# Altium PCB MODULE_DRIVER.PcbDoc (part 2 of 2)
Units mil, origin at the board's own origin, x right, y up, seen from the top; angles counter-clockwise.
Board outline 3897.64 x 6754.13 mil, 4 copper layers (TOP, GND, POWER, BOTTOM), stack 23.756 mil thick; 214 components, 85 nets, 571 pads, 350 vias.
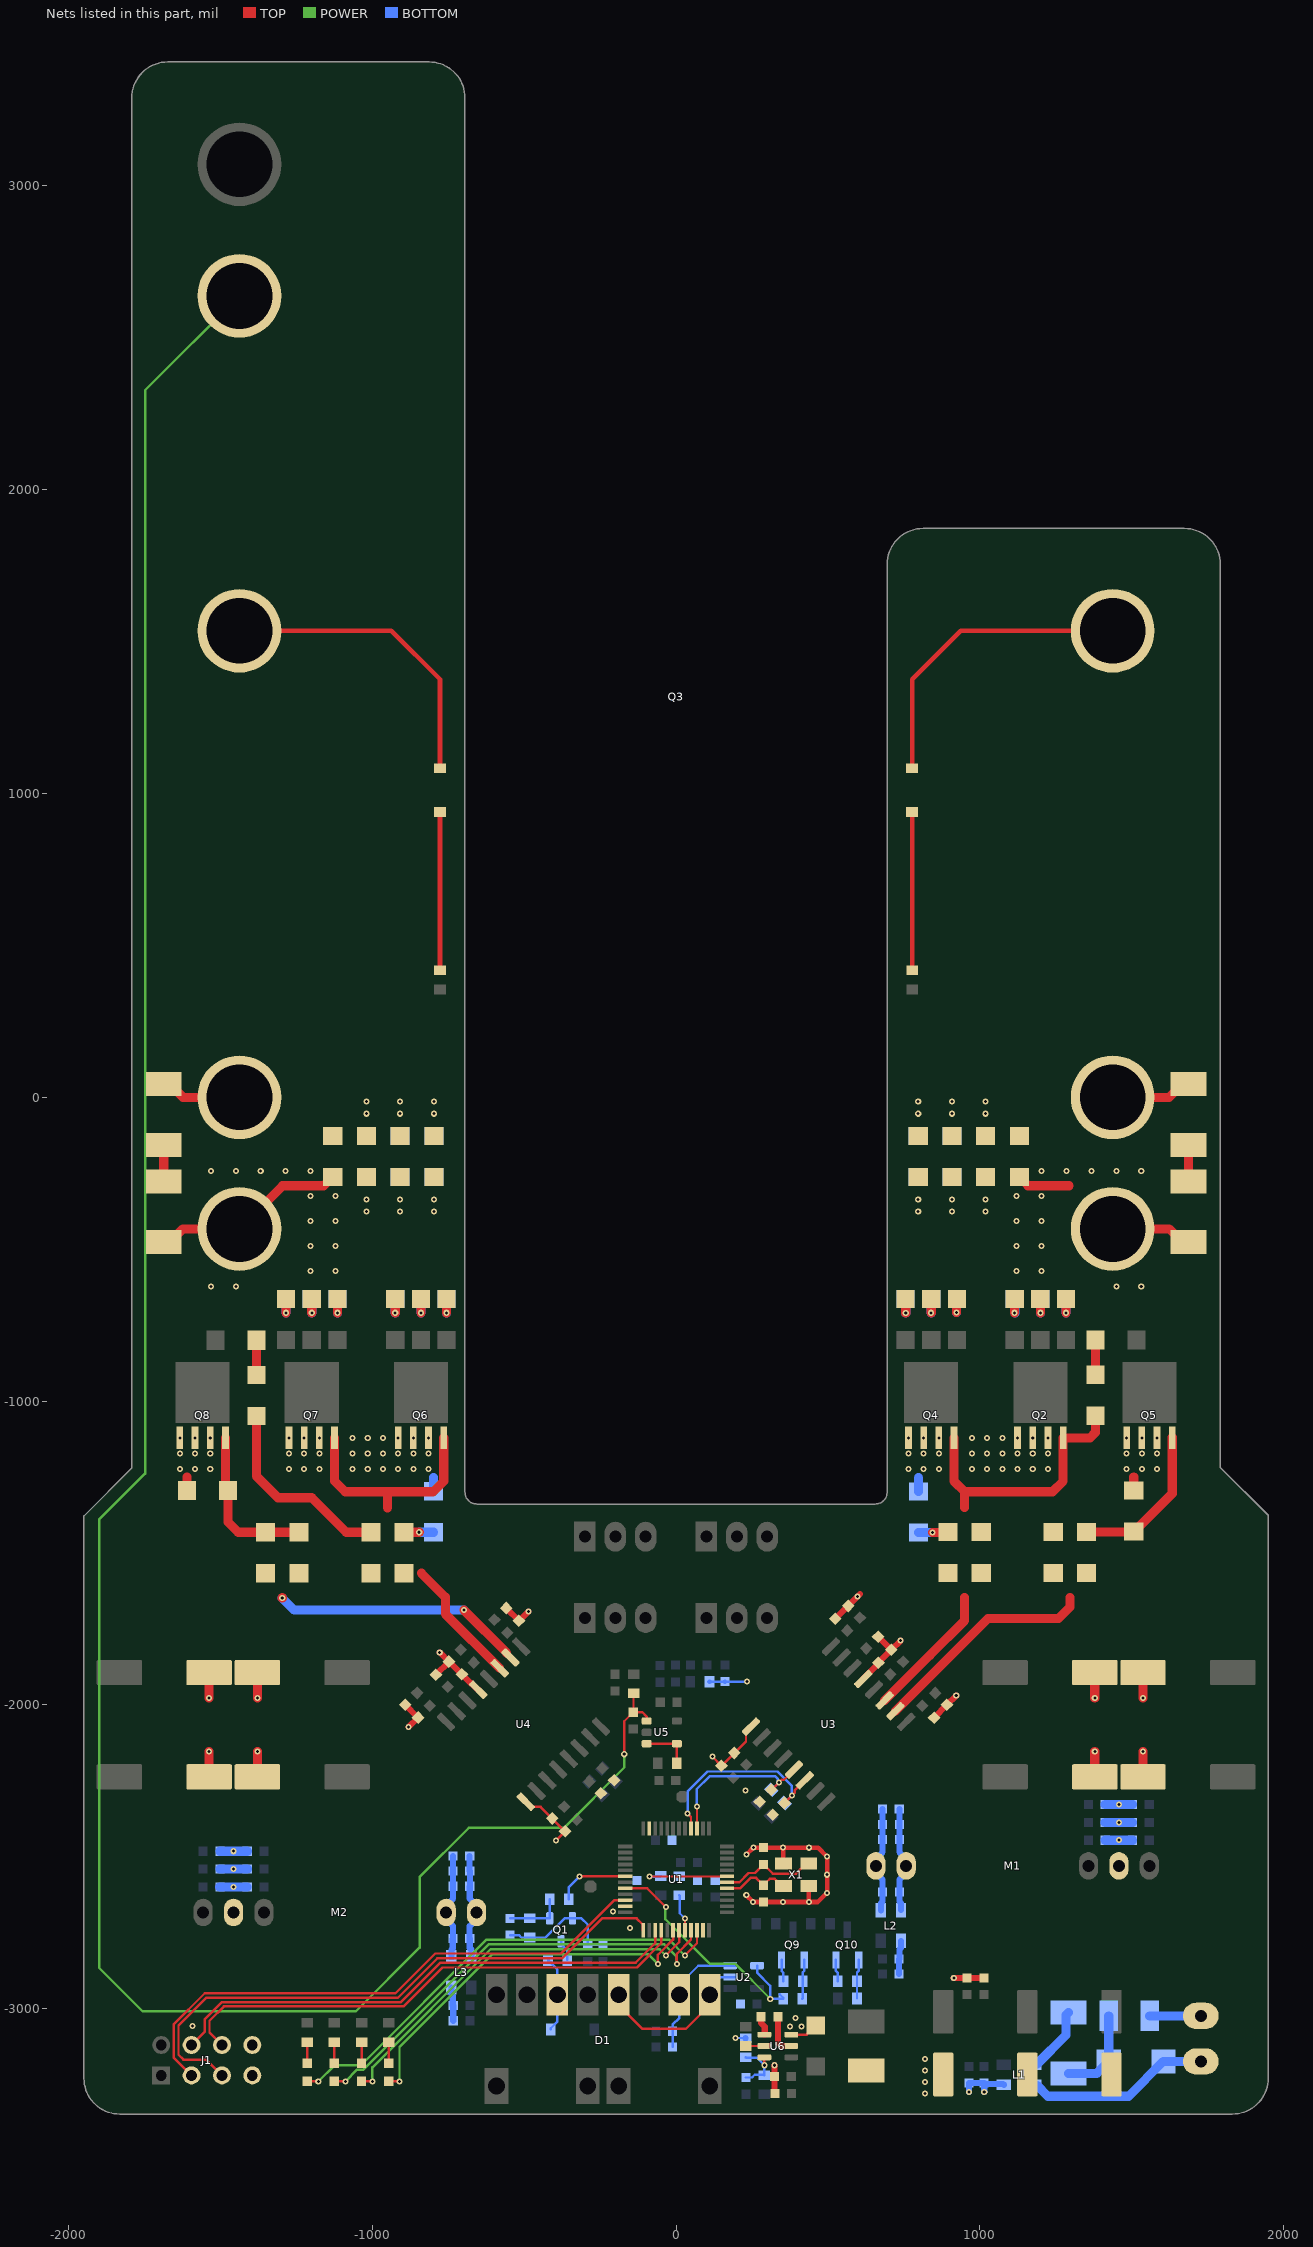
[diagram p4: the nets of this part, all layers, seen from the top]

## Via types
v1: diameter 20, hole 10, TOP to BOTTOM, tented both sides, 350 vias

## Nets (pads, with @x,y where several pads share a name; then routed paths per layer and width w, separated by ;. In a path a pad name is that pad's centre, name@x,y a point inside that pad or via, vN(x,y) a via of type N, cw(c..) or ccw(c..) an arc to the next point about the centre after c; other vN are vias at no path point) (continued)
GND: C1.2 C2.1 C3.2 C4.2 C5.2 C6.2 C7.2 C8.2 C9.2 C11.1 C12.2 C13.1 C14.2 C15.2 C29.1 C30.1 C45.2 C46.2 C60.1 C61.1 C80.1 C81.2 C82.1 C83.2 C89.2 C90.2 C91.2 C92.1 C93.2 C99.2 C100.2 C113.2 D1.2 EC9.2 EC10.2 EC11.2 J1.7 J1.8 L1.3 L2.1 L3.2 Q1.2 Q9.3 Q10.3 R1.1 R5.1 R50.1 R51.1 R53.2 R55.1 U1.23 U1.35 U1.47 U2.3 U3.1 U4.1 U6.3 X1.2 X1.4 | length 3048.3
  TOP w8: U4.1@-494.28,-2318.68 -477.58,-2335.38 -445.71,-2335.38 -365.21,-2415.88 v1(-395.29,-2445.96) ; v1(119.51,-2170.18) 149.59,-2200.26 230.09,-2119.76 230.09,-2087.89 U3.1@246.79,-2071.19 ; U6.3@379.29,-3085 429.9,-3085 C91.2@460,-3054.9
  TOP w15: v1(231.09,-2625.76) v1(253.73,-2648.4) v1(436.93,-2648.4) ; v1(231.8,-2492.18) v1(254.44,-2469.54) C12.2@287.98,-2469.54 v1(352.17,-2469.54) ; X1.4@353.64,-2521.57 352.17,-2520.1 v1(352.17,-2469.54) ; X1.2@436.32,-2596.37 436.32,-2647.79 v1(436.93,-2648.4) ; v1(352.17,-2469.54) 467.52,-2469.54 v1(496.98,-2499) v1(496.98,-2558.61) v1(496.98,-2618.23) 466.81,-2648.4 v1(436.93,-2648.4)
  TOP w20: v1(324.29,-3185.71) C89.2@324.29,-3223 324.65,-3223.35 324.65,-3278.65 C90.2@325,-3279 ; v1(914,-2898) C100.2@957,-2898 C99.2@1013,-2898
  BOTTOM w8: C13.1@-546.54,-2757.15 -517.39,-2757.15 -509.39,-2765.14 R5.1@-481.2,-2765.14 -430.2,-2765.14 -367.2,-2702.15 Q1.2@-341.07,-2702.15 -311.39,-2702.15 -290.6,-2722.93 C4.2@-290.6,-2789.36 C5.2@-240.17,-2789.36 ; C2.1@-11.46,-3125.74 C1.2@-11.46,-3073.74 -11.46,-3052.08 10.78,-3029.84 D1.2@10.78,-2953.93 ; D1.2@11.01,-2953.63 11.01,-2920.18 73.19,-2858 U2.3@178.02,-2858 U2.3@198.02,-2858 ; R55.1@110.49,-1923.5 C113.2@160.5,-1923.5 ; C113.2@161,-1923 v1(234,-1923) ; v1(195.41,-3096) R53.2@228.19,-3096 ; Q9.3@347.2,-2839 347.2,-2875 352.61,-2880.41 R50.1@352.61,-2909 ; Q10.3@526.2,-2839 526.2,-2875 531.61,-2880.41 R51.1@531.61,-2909
  BOTTOM w15: R55.1@109.99,-1924 R55.1@110.49,-1923.5 ; C113.2@160.5,-1923.5 C113.2@161,-1923
  BOTTOM w20: L3.2@-739.74,-2929.67 -739.74,-2953.29 -735,-2958.03 C92.1@-735,-2989.28 ; C93.2@-733.26,-3039.28 C92.1@-733.26,-2989.28 ; R53.2@228.19,-3096 R53.2@229,-3096.81 ; C82.1@733.96,-2885.74 C83.2@733.96,-2835.74 ; C83.2@735.7,-2835.74 735.7,-2804.49 740.44,-2799.75 L2.1@740.44,-2776.13 ; v1(964.35,-3273.75) C81.2@964.35,-3244.42 ; C81.2@964.35,-3244.28 C81.2@964.35,-3244.42 ; C80.1@1014,-3244.21 C80.1@1014.21,-3244.42 ; v1(1014.35,-3273.89) C80.1@1014.35,-3244.56 ; L1.3@1078.8,-3249.85 1075.98,-3247.03 1016.82,-3247.03 C80.1@1014.35,-3244.56 ; C81.2@964.35,-3244.42 C80.1@1014.21,-3244.42 ; C80.1@1014.21,-3244.42 C80.1@1014.35,-3244.56 ; C80.1@1014.21,-3244.42 1014.35,-3244.42 C80.1@1014.35,-3244.56
  other v1: 818.91,-3279.28 818.91,-3241.28 818.91,-3203.28 818.91,-3165.28 374.5,-3058.4 412.5,-3058.4 -1591.55,-3057 393.5,-3030.4 -152,-2734 -208,-2680 351.82,-2648.19 437.28,-2469.75 229,-2281
GND_DN: C47.1 C49.1 C50.2 C51.1 C52.1 C53.1 C57.1 C58.1 C59.1 C63.2 C64.1 C65.1 C66.2 C67.1 C68.1 C69.1 C73.1 C74.1 C75.1 C107.2 C108.2 C109.1 C110.2 C111.2 C112.1 D12.K EC5.2 EC6.2 EC7.2 EC8.2 M2.9 Q3.2 R39.1 U4.13 | length 2242.2
  TOP w20: C65.1@-891.71,-1999.03 C65.1@-891.46,-1999.28 ; C65.1@-891.31,-1999.13 C65.1@-891.46,-1999.28 ; v1(-879.95,-2072.12) C66.2@-849.43,-2041.61 ; C66.2@-849.28,-2041.46 C65.1@-891.46,-1999.28 ; C47.1@-790.37,-1900.59 -790.37,-1900.34 -747.19,-1857.16 -746.94,-1857.16 C50.2@-704.77,-1899.34 -672.95,-1931.16 -670.84,-1931.16 -652.46,-1949.53 U4.13@-651.29,-1949.53 ; v1(-777.86,-1826.54) C49.1@-747.34,-1857.06 ; C64.1@-559.37,-1680.83 C64.1@-559.12,-1681.08 ; C64.1@-559.27,-1681.23 C64.1@-559.12,-1681.08 ; C63.2@-516.94,-1723.26 C64.1@-559.12,-1681.08 ; C63.2@-516.79,-1723.11 v1(-486.27,-1692.59)
  TOP w30: D12.K@-1686,-476.53 -1666.32,-476.53 -1622.85,-433.07 Q3.2@-1437.01,-433.07 -1294.94,-291 -1160.02,-291 -1131.5,-262.48 R39.1@-1130,-262.48 ; EC8.2@-1536.84,-2236.37 v1(-1536.84,-2152.99) ; v1(-1536.84,-1976.75) EC7.2@-1536.84,-1893.37 ; EC5.2@-1378.12,-2236.37 v1(-1378.12,-2152.99) ; v1(-1378.12,-1976.75) EC6.2@-1378.12,-1893.37 ; v1(-1283.52,-709.15) C73.1@-1283.52,-663.42 ; v1(-1198.93,-709.15) C74.1@-1198.93,-663.42 ; v1(-1114.33,-709.15) C75.1@-1114.33,-663.42 ; v1(-924.33,-709.15) C58.1@-924.33,-663.42 ; v1(-839.74,-709.15) C57.1@-839.74,-663.42 ; v1(-755.15,-709.15) C59.1@-755.15,-663.42
  BOTTOM w30: C109.1@-1501.69,-2598.9 C112.1@-1411.69,-2598.9 ; C107.2@-1501.48,-2539.91 C111.2@-1411.48,-2539.91 ; C108.2@-1501.48,-2481.28 C110.2@-1411.48,-2481.28 ; v1(-1283.52,-709.15) C69.1@-1283.52,-663.42 ; v1(-1198.93,-709.15) C68.1@-1198.93,-663.42 ; v1(-1114.33,-709.15) C67.1@-1114.33,-663.42 ; v1(-924.33,-709.15) C53.1@-924.33,-663.42 ; v1(-839.74,-709.15) C52.1@-839.74,-663.42 ; v1(-755.15,-709.15) C51.1@-755.15,-663.42
  other v1: -1456.69,-2598.9 -1456.48,-2539.91 -1456.48,-2481.28 -1531,-623.14 -1449,-623.14 -1203,-571 -1121,-571 -1203,-489 -1121,-489 -1203,-407 -1121,-407 -1203,-325 -1121,-325 -1531,-243 -1449,-243 -1367,-243 -1285,-243 -1203,-243
GND_UP: C16.1 C18.1 C19.2 C20.1 C21.1 C22.1 C26.1 C27.1 C28.1 C32.2 C33.1 C34.1 C35.2 C36.1 C37.1 C38.1 C42.1 C43.1 C44.1 C101.2 C102.2 C103.1 C104.2 C105.2 C106.1 D9.K EC1.2 EC2.2 EC3.2 EC4.2 M1.9 Q3.3 R22.1 U3.13 | length 2051.9
  TOP w20: C32.2@524.01,-1716.19 524.16,-1716.19 566.44,-1673.91 566.44,-1673.76 v1(596.96,-1643.24) 605.56,-1634.64 ; 605.71,-1634.79 605.56,-1634.64 ; 605.81,-1634.39 605.56,-1634.64 ; U3.13@615.94,-1914.18 665.98,-1864.13 C19.2@665.98,-1860.85 ; C16.1@664.88,-1775.09 C18.1@708.31,-1818.53 ; C19.2@665.88,-1860.95 C19.2@665.98,-1860.85 ; C19.2@665.98,-1860.55 C19.2@665.98,-1860.85 ; v1(738.82,-1788.01) C18.1@708.31,-1818.53 ; C35.2@849.03,-2041.71 C35.2@849.18,-2041.86 C34.1@891.61,-1999.43 ; C34.1@891.61,-1999.43 v1(922.12,-1968.91) ; C19.2@665.98,-1860.85 666.13,-1860.7 C18.1@708.31,-1818.53
  TOP w30: C43.1@755.15,-663.43 756,-664.28 v1(756,-710) ; v1(839.74,-709.15) C44.1@839.74,-663.43 ; v1(923.06,-707.88) 923.06,-664.69 C42.1@924.33,-663.43 ; v1(1114.33,-709.15) C28.1@1114.33,-663.43 ; R22.1@1130,-262.48 1158.52,-291 1293.44,-291 ; v1(1198.93,-709.15) C27.1@1198.93,-663.43 ; v1(1283.52,-709.15) C26.1@1283.52,-663.43 ; EC3.2@1378.12,-2236.37 v1(1378.12,-2152.99) ; v1(1378.12,-1976.75) EC4.2@1378.12,-1893.37 ; Q3.3@1437.01,-433.07 1622.85,-433.07 1666.31,-476.53 D9.K@1686,-476.53 ; EC2.2@1536.84,-2236.37 v1(1536.84,-2152.99) ; v1(1536.84,-1976.75) EC1.2@1536.84,-1893.37
  BOTTOM w30: v1(756,-710) C38.1@756,-664.28 ; v1(839.74,-709.15) C37.1@839.74,-663.43 ; v1(923.06,-707.88) 923.06,-664.69 C36.1@924.33,-663.43 ; v1@1115.19,-710 C21.1@1115.19,-664.28 ; v1(1198.93,-709.15) C20.1@1198.93,-663.43 ; v1(1283.52,-709.15) C22.1@1283.52,-663.43 ; C106.1@1412.48,-2445 C102.2@1501.91,-2445 ; C104.2@1412.48,-2386.37 C103.1@1502.48,-2386.37 ; C105.2@1412.48,-2327.74 C101.2@1502.48,-2327.74
  other v1: 1457.2,-2445 1457.48,-2386.37 1457.48,-2327.74 1449,-623.14 1531,-623.14 1121,-571 1203,-571 1121,-489 1203,-489 1121,-407 1203,-407 1121,-325 1203,-325 1203,-243 1285,-243 1367,-243 1449,-243 1531,-243
GPI_U_FLT: C30.2 R11.1 U1.16 U3.6 | length 685.6
  TOP w8: v1(38,-2357.47) 49.21,-2368.69 U1.16@49.21,-2406.68 ; C30.2@356.77,-2322.59 v1(381.45,-2297.91) 390.34,-2289.02 390.34,-2281.2 U3.6@423.57,-2247.97
  BOTTOM w8: v1(38,-2357.47) 38,-2284.43 103.43,-2219 333.66,-2219 381.45,-2266.79 v1(381.45,-2297.91) R11.1@356.77,-2322.59
GPI_U_RDY: C29.2 R10.1 U1.15 U3.5 | length 567.6
  TOP w8: U1.15@68.9,-2406.68 v1(68.9,-2334) ; C29.2@313.59,-2279.41 v1(338.27,-2254.73) 347.16,-2245.84 354.98,-2245.84 U3.5@388.21,-2212.61
  BOTTOM w8: v1@68.05,-2334 68.05,-2277 110.05,-2235 327,-2235 335.21,-2243.21 335.21,-2251.67 v1(338.27,-2254.73) R10.1@313.59,-2279.41
GPO_D_FLT: D6.1 U1.46 | length 1560.3
  TOP w8: D6.1@-1213.43,-3238.78 v1(-1177.52,-3238.78) ; v1@23.74,-2824.27 v1@26.24,-2821.77 ; v1(28.74,-2824.27) 68.9,-2784.11 U1.46@68.9,-2741.32
  POWER w8: v1(-1177.52,-3238.78) -1124.75,-3186 -1037.88,-3186 -623.88,-2772 -23.53,-2772 v1(28.74,-2824.27)
GPO_D_RDY: D5.1 U1.45 | length 1483.6
  TOP w8: D5.1@-1124.3,-3238.78 v1(-1088.4,-3238.78) ; v1(2.49,-2852.16) 2.49,-2818.51 49.21,-2771.79 U1.45@49.21,-2741.32
  POWER w8: v1(-1088.4,-3238.78) -1049.62,-3200 -1029.25,-3200 -617.25,-2788 -38.91,-2788 2.49,-2829.41 v1(2.49,-2852.16)
GPO_U_FLT: D3.1 U1.43 | length 1317.9
  TOP w8: D3.1@-1035.18,-3238.78 v1(-999.28,-3238.78) ; v1(-33.75,-2824.27) 9.84,-2780.68 U1.43@9.84,-2741.32
  POWER w8: v1(-999.28,-3238.78) -999.28,-3192.65 -610.63,-2804 -54.02,-2804 v1(-33.75,-2824.27)
GPO_U_RDY: D4.1 U1.42 | length 1270.4
  TOP w8: D4.1@-946.06,-3238.78 v1(-910.15,-3238.78) ; v1(-60,-2852.16) -60,-2822.23 -9.84,-2772.08 U1.42@-9.84,-2741.32
  POWER w8: v1(-910.15,-3238.78) -910.15,-3126.15 -604,-2820 -92.16,-2820 v1(-60,-2852.16)
NetC13_2: C13.2 Q1.1 R4.2 R5.2 | length 192.8
  BOTTOM w8: C13.2@-546.54,-2702.15 R5.2@-481.2,-2702.15 Q1.1@-415.87,-2702.15 R4.2@-415.87,-2640
NetC31_1: C31.1 R23.2 | length 114.5
  TOP w30: C31.1@1380.11,-913.36 R23.2@1380.11,-798.89
NetC31_2: C31.2 Q2.4 Q4.4 R15.2 R17.1 R18.2 | length 993.7
  TOP w30: v1(844,-1432) 893.77,-1432 R15.2@895.07,-1430.7 R15.2@893.37,-1429 ; Q4.4@914.74,-1120.65 914.74,-1263.02 949.74,-1298.02 ; 949.74,-1350.07 949.74,-1298.02 ; C31.2@1380.11,-1048.36 1380.11,-1103.07 1362.53,-1120.65 Q2.4@1273.93,-1120.65 1273.93,-1263.02 1238.93,-1298.02 949.74,-1298.02
  BOTTOM w30: R17.1@797.44,-1432 v1(844,-1432)
NetC62_1: C62.1 R40.2 | length 114.5
  TOP w30: C62.1@-1380.91,-914.16 R40.2@-1380.91,-799.69
NetC62_2: C62.2 Q6.4 Q7.4 R32.2 R34.1 R35.2 | length 1473.9
  TOP w30: C62.2@-1380.91,-1049.16 -1380.91,-1247.09 -1310,-1318 -1199,-1318 -1085.56,-1431.44 R35.2@-1004.41,-1431.44 ; Q7.4@-1123.93,-1120.65 -1123.93,-1263.02 -1088.93,-1298.02 -947.24,-1298.02 ; -949.74,-1350.81 -949.74,-1300.51 -947.24,-1298.02 ; R32.2@-895.07,-1431.44 v1(-845.3,-1431.44) ; Q6.4@-764.74,-1120.65 -764.74,-1263.02 -799.74,-1298.02 -947.24,-1298.02
  BOTTOM w30: v1(-845.3,-1431.44) R34.1@-798.74,-1431.44
NetC78_2: C78.2 Q3.7 R46.1 U5.1 | length 8270.2
  TOP w8: v1(-170.5,-2162) -170.5,-2053.5 C78.2@-141,-2024 -140,-2023 R46.1@-140,-1961.99 ; C78.2@-140,-2024 -111,-2024 -97,-2038 -97,-2052.4 U5.1@-96.8,-2052.6
  POWER w8: Q3.7@-1437.01,2637.8 -1747.65,2327.15 -1747.65,-1202.38 -1747.65,-1238.57 -1899,-1389.91 -1899,-2865 -1756,-3008 -1053.33,-3008 -844,-2798.67 -844,-2566.2 -682.3,-2404.5 -369.3,-2404.5 -170.5,-2205.7 v1(-170.5,-2162)
NetC84_1: C84.1 C85.1 C86.1 C87.2 L2.3 M1.1 | length 353.3
  BOTTOM w20: L2.3@674.22,-2675.73 674.22,-2652.11 678.96,-2647.37 678.96,-2616.12 C87.2@679.8,-2615.29 ; C85.1@679.37,-2393.05 C86.1@679.37,-2343.05 ; C84.1@679.8,-2443.05 C85.1@679.8,-2393.05 ; C87.2@680.01,-2615.29 680.01,-2574.7 657.48,-2552.17 M1.1@657.48,-2529.35 657.48,-2506.52 680.01,-2483.99 C84.1@680.01,-2443.41
NetC84_2: C84.2 C85.2 C86.2 C87.1 L2.4 M1.2 | length 299.8
  BOTTOM w20: C85.2@734.74,-2393.05 C86.2@734.74,-2343.05 ; C87.1@734.95,-2615.29 734.95,-2574.7 M1.2@757.48,-2552.17 ; C84.2@734.95,-2443.41 734.95,-2483.99 M1.2@757.48,-2506.52 ; 735.16,-2646.53 C87.1@735.16,-2615.29 ; C84.2@735.16,-2443.05 C85.2@735.16,-2393.05 ; L2.4@739.9,-2674.9 739.9,-2651.27
NetC88_2: C88.2 R52.2 R53.1 U6.6 | length 195.5
  TOP w8: v1(290.71,-3185.71) U6.6@290.71,-3159.8
  BOTTOM w8: R53.1@229,-3159.8 230.2,-3161 266,-3161 v1(290.71,-3185.71) R52.2@290.71,-3218 289.71,-3217 259,-3217 250,-3226 C88.2@230,-3225.99
NetC94_1: C94.1 C95.1 C96.1 C97.2 L3.4 M2.1 | length 353.3
  BOTTOM w20: C97.2@-679.16,-2768.83 -679,-2768.99 -679,-2800.18 -673.52,-2805.66 L3.4@-673.52,-2829.28 ; C97.2@-679.16,-2768.48 -679.16,-2727.89 -656.63,-2705.36 M2.1@-656.63,-2682.54 ; C96.1@-679.16,-2546.6 C94.1@-679.16,-2496.6 ; C95.1@-679.01,-2596.95 -679.01,-2637.53 -656.48,-2660.07 M2.1@-656.48,-2682.89 ; C95.1@-678.8,-2596.6 C96.1@-678.8,-2546.6
NetC94_2: C94.2 C95.2 C96.2 C97.1 L3.3 M2.2 | length 353.3
  BOTTOM w20: L3.3@-739.74,-2829.28 -739.74,-2805.66 -735,-2800.92 -735,-2769.67 C97.1@-734.16,-2768.83 ; C95.2@-734.16,-2596.6 C96.2@-734.16,-2546.6 C94.2@-734.16,-2496.6 ; C97.1@-733.95,-2768.83 -733.95,-2728.25 -756.48,-2705.71 M2.2@-756.48,-2682.89 -756.48,-2660.07 -733.95,-2637.53 C95.2@-733.95,-2596.95
NetC98_1: C98.1 L4.1 U6.2 | length 153.6
  TOP w8: L4.1@611.26,-3203.11 L4.1@631,-3203.11
  TOP w20: C98.1@335,-3026 335,-3110.69 346.72,-3122.4 U6.2@379.29,-3122.4
NetC98_2: C98.2 U6.4 | length 64.9
  TOP w20: C98.2@280,-3026 280,-3047 292,-3059 292,-3084.45 291.45,-3085 U6.4@290.71,-3085
NetD1_1: D1.1 D1.4 U2.2 | length 558.7
  TOP w8: D1.4@-188.99,-2953.63 -188.99,-2987.08 -110.07,-3066 32.09,-3066 111.01,-2987.08 D1.1@111.01,-2953.63
  BOTTOM w8: D1.1@111.01,-2953.63 111.01,-2927.45 142.46,-2896 177.43,-2896 U2.2@178.02,-2895.4 U2.2@198.02,-2895.4
NetD1_6: D1.6 D2.A R3.1 | length 250.7
  BOTTOM w8: R3.1@-421.46,-2839.36 -390.37,-2870.45 D1.6@-390.37,-2953.93 ; D2.A@-412.6,-3067.74 -412.6,-3063.8 -390.6,-3041.8 D1.6@-390.6,-2953.63
NetD3_2: D3.2 R6.2 | length 70.5
  TOP w8: D3.2@-1035.18,-3179.78 R6.2@-1035.18,-3109.31
NetD4_2: D4.2 R7.2 | length 70.5
  TOP w8: D4.2@-946.06,-3179.78 R7.2@-946.06,-3109.31
NetD5_2: D5.2 R8.2 | length 70.5
  TOP w8: D5.2@-1124.3,-3179.78 R8.2@-1124.3,-3109.31
NetD6_2: D6.2 R9.2 | length 70.5
  TOP w8: D6.2@-1213.43,-3179.78 R9.2@-1213.43,-3109.31
NetD7_A: D7.A R12.1 | length 521.1
  TOP w15: R12.1@777,417.92 D7.A@777,939
NetD7_K: D7.K Q3.5 | length 1018.7
  TOP w15: D7.K@777,1083 777,1375.43 937.01,1535.43 Q3.5@1437.01,1535.43
NetD8_A: D8.A D9.A | length 120
  TOP w30: D9.A@1686,-276.53 D8.A@1686,-156.53
NetD8_K: D8.K Q3.4 Q5.1 Q5.2 Q5.3 R13.2 R14.2 R16.2 R19.2 R20.2 R21.2 R22.2 R24.1 | length 312
  TOP w30: Q3.4@1437.01,0 1622.85,0 1666.31,43.46 D8.K@1686,43.47 ; R24.1@1506.37,-1294.22 1506.37,-1249.26
  other v1: 1483.11,-1222.65 1533.11,-1222.65 1583.11,-1222.65 1483.11,-1171.65 1533.11,-1171.65 1583.11,-1171.65 1483.11,-1120.65 1533.11,-1120.65 1583.11,-1120.65 797,-53.96 908,-53.96 1019,-53.96 797,-13.96 908,-13.96 1019,-13.96
NetD10_A: D10.A R29.1 | length 521.1
  TOP w15: R29.1@-777,417.92 D10.A@-777,939
NetD10_K: D10.K Q3.8 | length 1018.7
  TOP w15: Q3.8@-1437.01,1535.43 -937.01,1535.43 -777,1375.43 D10.K@-777,1083
NetD11_A: D11.A D12.A | length 120
  TOP w30: D12.A@-1686,-276.53 D11.A@-1686,-156.54
NetD11_K: D11.K Q3.1 Q8.1 Q8.2 Q8.3 R30.2 R31.2 R33.2 R36.2 R37.2 R38.2 R39.2 R41.1 | length 312
  TOP w30: D11.K@-1686,43.46 -1666.32,43.46 -1622.85,0 Q3.1@-1437.01,0 ; R41.1@-1609.85,-1294.22 -1609.85,-1249.26
  other v1: -1633.11,-1222.65 -1583.11,-1222.65 -1533.11,-1222.65 -1633.11,-1171.65 -1583.11,-1171.65 -1533.11,-1171.65 -1633.11,-1120.65 -1583.11,-1120.65 -1533.11,-1120.65 -1019,-53.96 -908,-53.96 -797,-53.96 -1019,-13.96 -908,-13.96 -797,-13.96
NetD13_A: D13.A D15.K F1.2 | length 299.3
  BOTTOM w30: D13.A@1291,-3212.43 1384.63,-3212.43 D15.K@1424,-3173.06 F1.2@1424,-3023.06
NetD13_K: D13.K L1.1 | length 221.3
  BOTTOM w30: L1.1@1179.2,-3183.63 1181.32,-3181.5 1187.82,-3181.5 1283.61,-3085.72 1283.61,-3019.82 D13.K@1291,-3012.43
NetD15_A: D15.A J2.1 L1.2 | length 611
  BOTTOM w30: L1.2@1179.2,-3249.85 1181.32,-3251.98 1187.82,-3251.98 1223.58,-3287.74 1489.31,-3287.74 D15.A@1604,-3173.06 J2.1@1727,-3173.06
NetF1_1: F1.1 J2.2 | length 168
  BOTTOM w30: F1.1@1559,-3023.06 J2.2@1727,-3023.06
NetQ1_3: Q1.3 R3.2 | length 69.9
  BOTTOM w8: Q1.3@-378.47,-2777.74 -378.47,-2786.2 -358.47,-2806.2 R3.2@-358.47,-2839.36
NetQ2_1: Q2.1 Q2.2 Q2.3 Q4.1 Q4.2 Q4.3 R13.1 R14.1 R16.1 R17.2 R19.1 R20.1 R21.1 | length 45
  BOTTOM w30: R17.2@797.44,-1297 797.44,-1252.04
  other v1: 764.74,-1222.65 814.74,-1222.65 864.74,-1222.65 973.93,-1222.65 1023.93,-1222.65 1073.93,-1222.65 1123.93,-1222.65 1173.93,-1222.65 1223.93,-1222.65 764.74,-1171.65 814.74,-1171.65 864.74,-1171.65 973.93,-1171.65 1023.93,-1171.65 1073.93,-1171.65 1123.93,-1171.65 1173.93,-1171.65 1223.93,-1171.65 764.74,-1120.65 814.74,-1120.65 864.74,-1120.65 973.93,-1120.65 1023.93,-1120.65 1073.93,-1120.65 1123.93,-1120.65 1173.93,-1120.65 1223.93,-1120.65 797,-376 908,-376 1019,-376 797,-336 908,-336 1019,-336
NetQ5_4: Q5.4 R24.2 R25.2 R26.2 | length 518.8
  TOP w30: R25.2@1350.85,-1430.7 1506.39,-1430.7 1633.11,-1303.98 Q5.4@1633.11,-1120.65 Q5.4@1633.11,-1119.91
NetQ6_1: Q6.1 Q6.2 Q6.3 Q7.1 Q7.2 Q7.3 R30.1 R31.1 R33.1 R34.2 R36.1 R37.1 R38.1 | length 45
  BOTTOM w30: R34.2@-798.74,-1296.44 -798.74,-1251.48
  other v1: -1273.93,-1222.65 -1223.93,-1222.65 -1173.93,-1222.65 -1064.74,-1222.65 -1014.74,-1222.65 -964.74,-1222.65 -914.74,-1222.65 -864.74,-1222.65 -814.74,-1222.65 -1273.93,-1171.65 -1223.93,-1171.65 -1173.93,-1171.65 -1064.74,-1171.65 -1014.74,-1171.65 -964.74,-1171.65 -914.74,-1171.65 -864.74,-1171.65 -814.74,-1171.65 -1273.93,-1120.65 -1223.93,-1120.65 -1173.93,-1120.65 -1064.74,-1120.65 -1014.74,-1120.65 -964.74,-1120.65 -914.74,-1120.65 -864.74,-1120.65 -814.74,-1120.65 -1019,-376 -908,-376 -797,-376 -1019,-336 -908,-336 -797,-336
NetQ8_4: Q8.4 R41.2 R42.2 R43.2 | length 524.2
  TOP w30: R41.2@-1483.11,-1294.22 Q8.4@-1483.11,-1120.65 ; R41.2@-1474.85,-1294.22 -1474.85,-1397.38 -1440.78,-1431.44 R43.2@-1350.85,-1431.44 R42.2@-1241.52,-1431.44
NetQ9_1: Q9.1 R48.1 R50.2 | length 130.7
  BOTTOM w8: R48.1@415.6,-2967 416.59,-2966.01 R50.2@416.59,-2909 416.59,-2880.41 422,-2875 Q9.1@422,-2839
NetQ10_1: Q10.1 R49.1 R51.2 | length 129.2
  BOTTOM w8: R49.1@595.59,-2966.01 R51.2@595.59,-2909 595.59,-2880.41 601,-2875 Q10.1@601,-2839
NetR1_2: R1.2 U1.44 | length 122.2
  TOP w8: U1.44@29.53,-2741.32 v1(29.53,-2702.98)
  BOTTOM w8: R1.2@10.98,-2626.79 11.98,-2627.79 11.98,-2685.43 v1(29.53,-2702.98)
NetR2_2: R2.2 U1.7 | length 293.6
  TOP w8: v1(-88,-2565) -87.58,-2564.58 166.9,-2564.58 U1.7@167.32,-2564.16
  BOTTOM w8: v1(-88,-2565) -53.19,-2565 R2.2@-51,-2562.81
NetR15_1: R15.1 R18.1 U3.11 | length 447.5
  TOP w30: U3.11@686.65,-1984.89 835,-1836.53 949.74,-1721.8 949.74,-1646.33
NetR25_1: R25.1 R26.1 U3.10 | length 747.5
  TOP w30: U3.10@722,-2020.24 1027.25,-1715 1259,-1715 1296.19,-1677.81 1296.19,-1646.33
NetR32_1: R32.1 R35.1 U4.11 | length 419.6
  TOP w30: -838.07,-1565.88 -759,-1644.96 -759,-1700.4 U4.11@-580.58,-1878.82
NetR42_1: R42.1 R43.1 U4.10 | length 814.5
  TOP w30: v1(-1296.19,-1648.48) v1@-1296.19,-1647.07 ; v1(-698,-1687.85) U4.10@-557.55,-1828.29
  BOTTOM w30: v1(-1296.19,-1648.48) -1256.82,-1687.85 v1(-698,-1687.85)
NetR47_1: R47.1 U5.3 U5.4 | length 163.2
  TOP w8: U5.3@-96.8,-2127.4 U5.4@2.8,-2127.4 R47.1@2.8,-2191
NetR54_2: R54.2 U6.5 | length 61.7
  TOP w8: R54.2@229,-3122.4 U6.5@290.71,-3122.4
OP_RX: R48.2 U1.32 U2.4 | length 843.4
  TOP w8: U1.32@-167.32,-2603.53 -95.02,-2603.53 v1(-33,-2665.55)
  POWER w8: v1(-33,-2665.55) -35,-2667.55 -35,-2705.35 110.65,-2851 194.02,-2851 v1(310.01,-2966.99)
  BOTTOM w8: U2.4@266.61,-2858 266.61,-2881 310.01,-2924.4 v1(310.01,-2966.99) R48.2@352.61,-2967 352.61,-2963.75 R48.2@340.86,-2952
OP_TX: R4.1 U1.30 | length 241.1
  TOP w8: v1(-317.88,-2564) -237.88,-2564 -237.72,-2564.16 ; -237.74,-2564.16 U1.30@-167.32,-2564.16
  BOTTOM w8: R4.1@-352.88,-2640 -352.88,-2599 v1(-317.88,-2564)
OSC_1: C11.2 U1.5 X1.1 | length 231.5
  TOP w8: U1.5@167.32,-2603.53 210.47,-2603.53 245,-2569 263.44,-2569 C11.2@287.63,-2593.19 298.63,-2582.19 298.63,-2581.62 308.13,-2572.12 324.51,-2572.12 330.08,-2577.69 330.08,-2580.69 345.77,-2596.37 X1.1@353.64,-2596.37
OSC_2: C12.1 U1.6 X1.3 | length 320
  TOP w8: U1.6@167.32,-2583.84 207.75,-2583.84 238.59,-2553 259.52,-2553 C12.1@287.98,-2524.54 318.41,-2554.97 395.04,-2554.97 428.45,-2521.57 X1.3@436.32,-2521.57
SWCLK: J1.5 U1.37 | length 1969
  TOP w8: J1.5@-1494.55,-3219.12 -1546.67,-3167 -1621.55,-3167 -1637.55,-3151 -1637.55,-3055 -1546.55,-2964 -916,-2964 -786,-2834 -375,-2834 -243.27,-2702.27 -129.82,-2702.27 -110.27,-2721.82 -110.27,-2739.32 U1.37@-108.27,-2741.32
SWDIO: J1.3 U1.34 | length 1847.7
  TOP w8: J1.3@-1594.55,-3219.12 -1653.55,-3160.12 -1653.55,-3051.2 -1551.18,-2948.83 -923.46,-2948.83 -792.63,-2818 -379,-2818 -203.9,-2642.9 U1.34@-167.32,-2642.9
USER_USART2_RX: J1.6 U1.40 | length 1731.7
  TOP w8: J1.6@-1494.55,-3119.12 -1535.55,-3078.12 -1535.55,-3039.35 -1488.2,-2992 -897,-2992 -769,-2864 -129,-2864 -49.21,-2784.21 U1.40@-49.21,-2741.32
USER_USART2_TX: J1.4 U1.39 | length 1731
  TOP w8: J1.4@-1594.55,-3119.12 -1551.55,-3076.12 -1551.55,-3035.55 -1494,-2978 -905.63,-2978 -775.63,-2848 -132.8,-2848 -68.9,-2784.1 U1.39@-68.9,-2741.32
pads on no net: D1.7 D1.8 U1.2 U1.3 U1.4 U1.14 U1.17 U1.20 U1.21 U1.25 U1.26 U1.29 U1.38 U1.41 U2.1 U3.2 U3.4 U3.15 U4.2 U4.4 U4.15

## Polygon pours and split planes (outlines as drawn)
GND on TOP "TOP-GND" (solid, remove dead copper, pour order 260): -1948.82,-3346.46 1044,-3346.46 1044,-3316.2 1508.14,-3316.2 1517.14,-3307.2 1517.14,-3153.29 1508.14,-3144.29 1094.12,-3144.29 1044.61,-3089.99 1044,-3090.6 1044,-2543.42 386,-1885.42 386,-1338.58 -386.01,-1338.58 -386.01,-1885.43 -1008.27,-2507.69 -1008.27,-2807.69 -1009.69,-2807.69 -1092,-2890 -1948.82,-2890
24V on TOP "TOP-24V" (solid, remove dead copper, pour order 234): 1508.14,-3081.3 1517.14,-3072.3 1517.14,-2946.6 1508.14,-2937.6 1081.41,-2937.6 1072.41,-2946.6 1072.41,-3072.3 1081.41,-3081.3 1210.55,-3081.3
3V3 on TOP "TOP-3V3" (solid, remove dead copper, pour order 231): 527.41,-3081.3 1028.43,-3081.3 1037.43,-3072.3 1037.43,-2946.6 1028.43,-2937.6 527.41,-2937.6 518.41,-2946.6 518.41,-3072.3
NetC98_1 on TOP "TOP-NetC98_1" (solid, remove dead copper, pour order 217): 379.29,-3131.85 491.26,-3131.85 518.41,-3159 518.41,-3294 527.41,-3303 680.35,-3303 689.35,-3294 689.35,-3121.95 680.35,-3112.95 379.29,-3112.95
GND on TOP "TOP-GND 1" (solid, remove dead copper, pour order 200): 360.62,-3094.45 481.35,-3094.45 490,-3085.8 490,-3024.9 481,-3015.9 374,-3015.9 365,-3024.9 365,-3036.09 356.65,-3044.44 356.65,-3090.48
24V on TOP "NONET_L-01_P-001" (solid, remove dead copper, pour order 196): 360.62,-3150.35 356.65,-3154.32 356.65,-3200.36 365,-3208.71 365,-3294 374,-3303 481,-3303 490,-3294 490,-3159 481.35,-3150.35
-9V_DN on TOP "TOP--9V_UP" (solid, remove dead copper, pour order 180): -1881.13,-2299.37 -1743.11,-2299.37 -1717.31,-2273.57 -1717.31,-1856.17 -1743.11,-1830.37 -1881.13,-1830.37 -1906.92,-1856.17 -1906.92,-2273.57
+15V_DN on TOP "TOP--9V_UP" (solid, remove dead copper, pour order 181): -1033.83,-2299.37 -1171.85,-2299.37 -1197.65,-2273.57 -1197.65,-1856.17 -1171.85,-1830.37 -1033.83,-1830.37 -1008.04,-1856.17 -1008.04,-2273.57
NetR32_1 on TOP "TOP-NetQ5_4" (solid, remove dead copper, pour order 191): -1043.74,-1532.81 -1032.74,-1521.81 -866.74,-1521.81 -838.07,-1550.48 -838.07,-1581.29 -855.74,-1598.96 -886.19,-1629.4 -1014.41,-1629.4 -1043.74,-1600.07
-9V_UP on TOP "-9V_UP_L01_P143" (solid, remove dead copper, pour order 143): 1443.52,-767.61 1443.52,-844.74 1483,-884.22 1633.22,-884.22 1672.7,-844.74 1672.7,-767.61 1647.28,-742.19 1468.94,-742.19
NetD11_K on TOP "TOP-NetD8_K 1" (solid, remove dead copper, pour order 163): -1181.68,-182.91 -1551.09,-182.91 -1590,-144 -1590,118.11 -1550.63,157.48 -772.06,157.48 -746.63,132.06 -746.63,-157.48 -772.06,-182.91
NetQ6_1 on TOP "TOP-NetQ6_1" (solid, remove dead copper, pour order 161): -1084.93,-1244.44 -1069.37,-1260 -819.3,-1260 -803.74,-1244.44 -803.74,-1084.15 -938.15,-1084.15 -953.74,-1068.56 -953.74,-878.74 -969.3,-863.18 -969.3,-627.3 -948.06,-606.06 -772.06,-606.06 -746.63,-580.63 -746.63,-232.48 -772.06,-207.05 -1043.94,-207.05 -1069.37,-232.48 -1069.37,-863.18 -1084.93,-878.74 -1084.93,-1100
NetQ6_1 on TOP "TOP-NetQ2_1 1" (solid, remove dead copper, pour order 156): -1284.93,-1244.44 -1269.37,-1260 -1178.48,-1260 -1162.93,-1244.44 -1162.93,-1084.15 -1284.93,-1084.15 -1284.93,-1150.74
NetC62_2 on TOP "Top Layer-NetR15_1" (solid, remove dead copper, pour order 153): -934.74,-1350.81 -917.74,-1367.81 -885.74,-1367.81 -855.74,-1397.81 -855.74,-1465.07 -866.74,-1476.07 -945.24,-1476.07 -1032.74,-1476.07 -1043.74,-1465.07 -1043.74,-1397.81 -1013.74,-1367.81 -981.74,-1367.81 -964.74,-1350.81
NetC31_2 on TOP "Top Layer-NetR15_1" (solid, remove dead copper, pour order 4): 964.74,-1350.07 981.74,-1367.07 1013.74,-1367.07 1043.74,-1397.07 1043.74,-1464.33 1032.74,-1475.33 954.24,-1475.33 866.74,-1475.33 855.74,-1464.33 855.74,-1397.07 885.74,-1367.07 917.74,-1367.07 934.74,-1350.07
NetR42_1 on TOP "Top Layer-NetR15_1" (solid, remove dead copper, pour order 152): -1281.19,-1647.07 -1264.19,-1630.07 -1232.19,-1630.07 -1202.19,-1600.07 -1202.19,-1532.81 -1213.19,-1521.81 -1291.69,-1521.81 -1379.19,-1521.81 -1390.19,-1532.81 -1390.19,-1600.07 -1360.19,-1630.07 -1328.19,-1630.07 -1311.19,-1647.07
NetQ8_4 on TOP "TOP-NetQ5_4" (solid, remove dead copper, pour order 151): -1202.19,-1465.07 -1213.19,-1476.07 -1379.19,-1476.07 -1407.85,-1447.41 -1407.85,-1416.59 -1390.19,-1398.93 -1359.74,-1368.48 -1231.52,-1368.48 -1202.19,-1397.81
NetD11_K on TOP "TOP-NetD8_K" (solid, remove dead copper, pour order 150): -1644.11,-1244.45 -1628.55,-1260 -1537.67,-1260 -1522.11,-1244.45 -1522.11,-1084.15 -1644.11,-1084.15 -1644.11,-1150.74
-9V_DN on TOP "-9V_DN_L01_P149" (solid, remove dead copper, pour order 149): -1672.7,-767.61 -1672.7,-844.74 -1633.22,-884.22 -1483,-884.22 -1443.52,-844.74 -1443.52,-767.61 -1468.94,-742.19 -1647.28,-742.19
-9V_DN on TOP "-9V_DN_L01_P146" (solid, remove dead copper, pour order 146): -1313.52,-768.42 -1313.52,-845.55 -1274.04,-885.04 -1123.81,-885.04 -1084.33,-845.55 -1084.33,-768.42 -1109.76,-743 -1288.09,-743
+15V_DN on TOP "+15V_DN_L01_P145" (solid, remove dead copper, pour order 145): -954.33,-768.42 -954.33,-845.55 -914.85,-885.04 -764.63,-885.04 -725.15,-845.55 -725.15,-768.42 -750.57,-743 -928.91,-743
NetD8_K on TOP "TOP-NetD8_K" (solid, remove dead copper, pour order 2): 1472.11,-1244.44 1487.67,-1260 1578.56,-1260 1594.11,-1244.44 1594.11,-1084.15 1472.11,-1084.15 1472.11,-1150.74
NetQ5_4 on TOP "TOP-NetQ5_4" (solid, remove dead copper, pour order 138): 1202.19,-1464.33 1213.19,-1475.33 1379.19,-1475.33 1407.85,-1446.66 1407.85,-1415.85 1390.19,-1398.19 1359.74,-1367.74 1231.52,-1367.74 1202.19,-1397.07
+15V_UP on TOP "+15V_UP_L01_P024" (solid, remove dead copper, pour order 24): 1084.33,-768.43 1084.33,-845.55 1123.82,-885.04 1274.04,-885.04 1313.52,-845.55 1313.52,-768.43 1288.09,-743 1109.76,-743
+15V_UP on TOP "TOP-+15V_UP" (solid, remove dead copper, pour order 132): 1881.13,-2299.37 1743.11,-2299.37 1717.31,-2273.57 1717.31,-1856.17 1743.11,-1830.37 1881.13,-1830.37 1906.92,-1856.17 1906.92,-2273.57
-9V_UP on TOP "TOP--9V_UP" (solid, remove dead copper, pour order 125): 1033.83,-2299.37 1171.85,-2299.37 1197.65,-2273.57 1197.65,-1856.17 1171.85,-1830.37 1033.83,-1830.37 1008.04,-1856.17 1008.04,-2273.57
NetQ2_1 on TOP "TOP-NetQ2_1" (solid, remove dead copper, pour order 72): 746.63,-580.63 772.06,-606.06 948.06,-606.06 969.3,-627.3 969.3,-863.18 953.74,-878.74 953.74,-1244.44 969.3,-1260 1219.37,-1260 1234.93,-1244.44 1234.93,-1084.15 1100.52,-1084.15 1084.93,-1068.56 1084.93,-878.74 1069.37,-863.18 1069.37,-232.48 1043.94,-207.05 772.06,-207.05 746.63,-232.48
NetD8_K on TOP "TOP-NetD8_K 1" (solid, remove dead copper, pour order 124): 1181.68,-182.91 1551.09,-182.91 1590,-144 1590,118.11 1550.63,157.48 772.06,157.48 746.63,132.06 746.63,-157.48 772.06,-182.91
NetR15_1 on TOP "Top Layer-NetR15_1" (solid, remove dead copper, pour order 3): 964.74,-1646.33 981.74,-1629.33 1013.74,-1629.33 1043.74,-1599.33 1043.74,-1532.07 1032.74,-1521.07 954.24,-1521.07 866.74,-1521.07 855.74,-1532.07 855.74,-1599.33 885.74,-1629.33 917.74,-1629.33 934.74,-1646.33
NetR25_1 on TOP "Top Layer-NetR15_1" (solid, remove dead copper, pour order 9): 1311.19,-1646.33 1328.19,-1629.33 1360.19,-1629.33 1390.19,-1599.33 1390.19,-1532.07 1379.19,-1521.07 1300.69,-1521.07 1213.19,-1521.07 1202.19,-1532.07 1202.19,-1599.33 1232.19,-1629.33 1264.19,-1629.33 1281.19,-1646.33
-9V_UP on TOP "-9V_UP_L01_P014" (solid, remove dead copper, pour order 14): 725.15,-768.43 725.15,-845.55 764.63,-885.04 914.85,-885.04 954.33,-845.55 954.33,-768.43 928.91,-743 750.57,-743
NetQ2_1 on TOP "TOP-NetQ2_1 1" (solid, remove dead copper, pour order 51): 753.74,-1244.44 769.3,-1260 860.18,-1260 875.74,-1244.44 875.74,-1084.15 753.74,-1084.15 753.74,-1150.74
GND_UP on BOTTOM "GND-GND_UP 1" (solid, remove dead copper, pour order 264): 1948.82,-2596.13 1948.82,-1377.55 1791.34,-1220.07 1791.34,446 665.24,446 665.24,-1183.1 cw(c547.13,-1183.11) 547.13,-1301.21 550.99,-1301.09 547.25,-1301.09 433,-1415.34 433,-1793 1108.27,-2468.27 1108.27,-2596.13 1251,-2738.87 1808,-2738.87
GND_DN on BOTTOM "GND-GND_DN" (solid, remove dead copper, pour order 263): -1108.27,-2695.2 -1108.27,-2468.27 -433,-1793 -433,-1415.34 -547.25,-1301.09 -550.99,-1301.09 -547.13,-1301.21 cw(c-547.13,-1183.11) -665.24,-1183.1 -665.24,446 -1791.34,446 -1791.34,-1220.07 -1948.82,-1377.55 -1948.82,-2697.12 -1807.94,-2838 -1251.06,-2838
GND on BOTTOM "BOTTOM-GND" (solid, remove dead copper, pour order 251): 1044,-3346.46 1044,-2543.42 386,-1885.42 386,-1338.58 -386.01,-1338.58 -386.01,-1885.43 -1008.27,-2507.69 -1008.27,-2807.69 -1009.69,-2807.69 -1092,-2890 -1948.82,-2890 -1948.82,-3346.46
-9V_DN on BOTTOM "-9V_DN_L04_P253" (solid, remove dead copper, pour order 253): -1313.52,-768.42 -1313.52,-845.55 -1274.04,-885.04 -1123.81,-885.04 -1084.33,-845.55 -1084.33,-768.42 -1109.76,-743 -1288.09,-743
+15V_DN on BOTTOM "+15V_DN_L04_P252" (solid, remove dead copper, pour order 252): -954.33,-768.42 -954.33,-845.55 -914.85,-885.04 -764.63,-885.04 -725.15,-845.55 -725.15,-768.42 -750.57,-743 -928.91,-743
NetQ6_1 on BOTTOM "BOTTOM-NetQ6_1" (solid, remove dead copper, pour order 167): -1178.48,-1260 -769.3,-1260 -753.74,-1244.44 -753.74,-1084.15 -938.15,-1084.15 -953.74,-1068.56 -953.74,-878.74 -969.3,-863.18 -969.3,-627.3 -948.06,-606.06 -772.06,-606.06 -746.63,-580.63 -746.63,-232.48 -772.06,-207.05 -1043.94,-207.05 -1069.37,-232.48 -1069.37,-863.18 -1084.93,-878.74 -1084.93,-1068.56 -1100.52,-1084.15 -1234.93,-1084.15 -1284.93,-1084.15 -1284.93,-1244.44 -1269.37,-1260 -1178.48,-1260
NetD11_K on BOTTOM "BOTTOM-NetD8_K" (solid, remove dead copper, pour order 164): -1746.74,-1259.26 -1761,-1245 -1761,121 -1724.52,157.48 -1550.63,157.48 -772.06,157.48 -746.63,132.06 -746.63,-157.48 -772.06,-182.91 -1560.91,-182.91 -1614.61,-236.61 -1614.61,-933.39 -1522.11,-1025.89 -1522.11,-1244.45 -1536.92,-1259.26 -1587.67,-1259.26 -1666.41,-1259.26
-9V_UP on BOTTOM "-9V_UP_L04_P010" (solid, remove dead copper, pour order 10): 725.15,-768.43 725.15,-845.55 750.74,-871.15 928.74,-871.15 954.33,-845.55 954.33,-768.43 928.91,-743 750.57,-743
NetD8_K on BOTTOM "BOTTOM-NetD8_K" (solid, remove dead copper, pour order 102): 1750.15,-1259.26 1762,-1247.41 1762,120 1724.52,157.48 1550.63,157.48 772.06,157.48 746.63,132.06 746.63,-157.48 772.06,-182.91 1560.91,-182.91 1614.61,-236.61 1614.61,-933.39 1472.11,-1075.89 1472.11,-1243.7 1487.67,-1259.26 1578.56,-1259.26 1666.41,-1259.26
NetQ2_1 on BOTTOM "BOTTOM-NetQ2_1" (solid, remove dead copper, pour order 89): 753.74,-1244.44 769.3,-1260 1219.37,-1260 1234.93,-1244.44 1234.93,-1084.15 1100.52,-1084.15 1084.93,-1068.56 1084.93,-878.74 1069.37,-863.18 1069.37,-232.48 1043.94,-207.05 772.06,-207.05 746.63,-232.48 746.63,-580.63 772.06,-606.06 948.06,-606.06 969.3,-627.3 969.3,-863.18 953.74,-878.74 953.74,-1068.56 938.15,-1084.15 753.74,-1084.15
+15V_UP on BOTTOM "NONET_L-01_P-001" (solid, remove dead copper, pour order 92): 1109.93,-871.15 1109.93,-1072.15 1287.93,-1072.15 1287.93,-871.15
-9V_UP on BOTTOM "NONET_L-01_P-001" (solid, remove dead copper, pour order 91): 750.74,-871.15 750.74,-1072.15 928.74,-1072.15 928.74,-871.15
GND_UP on BOTTOM "BOTTOM-GND_UP" (solid, remove dead copper, pour order 90): 1550.63,-606.06 1590,-566.69 1590,-246.42 1550.63,-207.05 1123.93,-207.05 1098.5,-232.48 1098.5,-580.63 1123.93,-606.06
+15V_UP on BOTTOM "+15V_UP_L04_P013" (solid, remove dead copper, pour order 13): 1084.33,-768.43 1084.33,-845.55 1109.93,-871.15 1287.93,-871.15 1313.52,-845.55 1313.52,-768.43 1288.09,-743 1109.76,-743
3V3 on POWER "POWER-3V3" (solid, remove dead copper, pour order 262): -1948.82,-3346.46 1044,-3346.46 1044,-3316.2 1508.14,-3316.2 1517.14,-3307.2 1517.14,-3153.29 1508.14,-3144.29 1094.12,-3144.29 1044.61,-3089.99 1044,-3090.6 1044,-2543.42 386,-1885.42 386,-1338.58 -386.01,-1338.58 -386.01,-1885.43 -1008.27,-2507.69 -1008.27,-2807.69 -1009.69,-2807.69 -1092,-2890 -1948.82,-2890
-9V_DN on POWER "POWER--9V_DN" (solid, remove dead copper, pour order 186): -1469.2,-871.11 -1443.61,-845.52 -1443.61,-768.39 -1469.04,-742.97 -1621.78,-742.97 -1647.2,-768.39 -1647.2,-871.11
-9V_DN on POWER "NONET_L-01_P-001" (solid, remove dead copper, pour order 177): -1515.91,-742.96 -1515.91,-917.82 -1443.61,-845.52 -1313.55,-845.52 -1241.22,-917.85 -1241.22,-743.01
-9V_UP on POWER "NONET_L-01_P-001" (solid, remove dead copper, pour order 137): 1469.2,-871.13 1469.2,-1072.13 1647.2,-1072.13 1647.2,-871.13
-9V_UP on POWER "-9V_UP_L03_P139" (solid, remove dead copper, pour order 139): 1443.61,-768.41 1443.61,-845.54 1469.2,-871.13 1647.2,-871.13 1672.8,-845.54 1672.8,-768.41 1647.37,-742.98 1469.04,-742.98
-9V_DN on POWER "NONET_L-01_P-001" (solid, remove dead copper, pour order 174): -1469.2,-871.11 -1469.2,-1072.11 -1647.2,-1072.11 -1647.2,-871.11
-9V_DN on POWER "-9V_DN_L03_P173" (solid, remove dead copper, pour order 173): -1084.33,-768.42 -1084.33,-845.55 -1109.93,-871.15 -1287.93,-871.15 -1313.52,-845.55 -1313.52,-768.42 -1288.09,-743 -1109.76,-743
+15V_DN on POWER "+15V_DN_L03_P172" (solid, remove dead copper, pour order 172): -725.15,-768.42 -725.15,-845.55 -750.74,-871.15 -928.74,-871.15 -954.33,-845.55 -954.33,-768.42 -928.91,-743 -750.57,-743
-9V_DN on POWER "NONET_L-01_P-001" (solid, remove dead copper, pour order 171): -1109.93,-871.15 -1109.93,-1072.15 -1287.93,-1072.15 -1287.93,-871.15
+15V_DN on POWER "NONET_L-01_P-001" (solid, remove dead copper, pour order 170): -750.74,-871.15 -750.74,-1072.15 -928.74,-1072.15 -928.74,-871.15
-9V_UP on POWER "-9V_UP_L03_P126" (solid, remove dead copper, pour order 126): 725.15,-768.43 725.15,-845.55 750.74,-871.15 928.74,-871.15 954.33,-845.55 954.33,-768.43 928.91,-743 750.57,-743
+15V_UP on POWER "NONET_L-01_P-001" (solid, remove dead copper, pour order 114): 1109.93,-871.15 1109.93,-1072.15 1287.93,-1072.15 1287.93,-871.15
+15V_UP on POWER "+15V_UP_L03_P128" (solid, remove dead copper, pour order 128): 1084.33,-768.43 1084.33,-845.55 1109.93,-871.15 1287.93,-871.15 1313.52,-845.55 1313.52,-768.43 1288.09,-743 1109.76,-743
-9V_UP on POWER "NONET_L-01_P-001" (solid, remove dead copper, pour order 113): 750.74,-871.15 750.74,-1072.15 928.74,-1072.15 928.74,-871.15
GND_DN on GND "GND-GND_DN" (solid, remove dead copper, pour order 195): -1108.27,-2695.2 -1108.27,-2468.27 -433,-1793 -433,-1415.34 -547.25,-1301.09 -550.99,-1301.09 -547.13,-1301.21 cw(c-547.13,-1183.11) -665.24,-1183.1 -665.24,446 -1791.34,446 -1791.34,-1220.07 -1948.82,-1377.55 -1948.82,-2697.12 -1807.94,-2838 -1251.06,-2838
GND_UP on GND "GND-GND_UP 1" (solid, remove dead copper, pour order 190): 1948.82,-2596.13 1948.82,-1377.55 1791.34,-1220.07 1791.34,446 665.24,446 665.24,-1183.1 cw(c547.13,-1183.11) 547.13,-1301.21 550.99,-1301.09 547.25,-1301.09 433,-1415.34 433,-1793 1108.27,-2468.27 1108.27,-2596.13 1251,-2738.87 1808,-2738.87
GND on GND "GND-GND 1" (solid, remove dead copper, pour order 261): -1948.82,-3346.46 1044,-3346.46 1044,-3316.2 1508.14,-3316.2 1517.14,-3307.2 1517.14,-3153.29 1508.14,-3144.29 1094.12,-3144.29 1044.61,-3089.99 1044,-3090.6 1044,-2543.42 386,-1885.42 386,-1338.58 -386.01,-1338.58 -386.01,-1885.43 -1008.27,-2507.69 -1008.27,-2807.69 -1009.69,-2807.69 -1092,-2890 -1948.82,-2890
GND on GND "GND-GND" (solid, remove dead copper, pour order 258): 795.41,-3307.2 804.41,-3316.2 1508.14,-3316.2 1517.14,-3307.2 1517.14,-3153.29 1508.14,-3144.29 804.41,-3144.29 795.41,-3153.29 795.41,-3294

## Keep-outs
Keep-Out Layer:
  lines w20: -694.73,3289.57 -694.73,-1299.21 ccw(c-655.36,-1299.21) -655.36,-1338.58 655.39,-1338.58 ccw(c655.39,-1299.21) 694.76,-1299.21 694.76,1754.37
  lines w39.37: -1948.82,-3228.35 -1948.82,-1377.95 -1791.34,-1220.47 -1791.34,3289.57 ; 1791.34,1754.37 1791.34,-1218.07 1948.82,-1375.55 1948.82,-3228.35
  lines w40: -1948.82,-3228.35 ccw(c-1830.71,-3228.35) -1830.71,-3346.46 1830.71,-3346.46 ccw(c1830.71,-3228.35) 1948.82,-3228.35
  lines w80: -1794,-2890 -1090.58,-2890 -1008.27,-2807.69 -1008.27,-2507.69 -386.01,-1885.43 -386.01,-1410.43 ; 386.01,-1410.43 386.01,-1885.43 1008.27,-2507.69 1008.27,-2807.69

## Other copper
TOP:
  pour cut-out: -1948.81,-2940.43 -1948.82,-2890 -1844.43,-2890 -1794,-2940.43
  pour cut-out: 957.83,-2807.69 958,-2807.85 958,-2862 1045,-2862 1045,-2807.85
  pour cut-out: 326.67,-2504.64 326.67,-2613.3 463.29,-2613.3 463.29,-2504.64
  pour cut-out: -648.92,-2210.24 -541.05,-2318.12 -247.35,-2024.42 -355.22,-1916.54
  pour cut-out: 355.23,-1916.54 247.35,-2024.42 541.05,-2318.12 648.93,-2210.24
GND:
  pour cut-out: -1948.81,-2940.43 -1948.82,-2890 -1844.43,-2890 -1794,-2940.43
  pour cut-out: 957.83,-2807.69 958,-2807.85 958,-2862 1045,-2862 1045,-2807.85
  pour cut-out: -648.92,-2210.24 -541.05,-2318.12 -247.35,-2024.42 -355.22,-1916.54
  pour cut-out: 355.23,-1916.54 247.35,-2024.42 541.05,-2318.12 648.93,-2210.24
POWER:
  pour cut-out: -1948.81,-2940.43 -1948.82,-2890 -1844.43,-2890 -1794,-2940.43
  pour cut-out: 957.83,-2807.69 958,-2807.85 958,-2862 1045,-2862 1045,-2807.85
  pour cut-out: -648.92,-2210.24 -541.05,-2318.12 -247.35,-2024.42 -355.22,-1916.54
  pour cut-out: 355.23,-1916.54 247.35,-2024.42 541.05,-2318.12 648.93,-2210.24
BOTTOM:
  pour cut-out: -1948.81,-2940.43 -1948.82,-2890 -1844.43,-2890 -1794,-2940.43
  pour cut-out: 957.83,-2807.69 958,-2807.85 958,-2862 1045,-2862 1045,-2807.85
  pour cut-out: -765.72,-2798.37 -765.72,-2960.58 -647.53,-2960.58 -647.53,-2798.37
  pour cut-out: 648.24,-2644.83 648.24,-2807.03 766.43,-2807.03 766.43,-2644.83
  pour cut-out: -648.92,-2210.24 -541.05,-2318.12 -247.35,-2024.42 -355.22,-1916.54
  pour cut-out: 355.23,-1916.54 247.35,-2024.42 541.05,-2318.12 648.93,-2210.24

## Silkscreen, mask and mechanical layers (free items; w line width, h text height)
Top Overlay:
  drawing of 41 lines, arcs and shapes, not listed
  text "IGBT Driver" at 1072,822 h100
  text "Version 1.0" at 1072,731 h100
  text "Designed By" at 1103,642.75 h80
  text "2025.08.28    ZJU" at 1100,568.89 h80
  text "Jiaxin Qian" at 1104,490.09 h80
  text "DFLT" at -1231.33,-2862 h60 r270
  text "DRDY" at -1142.21,-2862 h60 r270
  text "UFLT" at -1052.69,-2862 h60 r270
  text "URDY" at -963.57,-2862 h60 r270
  text "+24V" at 1665.83,-2937.26 h60
  text "3V3" at -1739.13,-2991.21 h60
  text "TX" at -1630.97,-2991.23 h60
  text "RX" at -1532.91,-2991.23 h60
  text "G" at -1414.19,-2991.23 h60
  text "3V3" at -1739.13,-3057.21 h60
  text "IO" at -1624.61,-3057.08 h60
  text "CLK" at -1552.35,-3057.23 h60
  text "G" at -1414.19,-3057.23 h60
  text "GND" at 1784.82,-3278.85 h60 r180
Mechanical 1:
  lines w10: -694.73,-1299.21 ccw(c-655.36,-1299.21) -655.36,-1338.58 655.39,-1338.58 ccw(c655.39,-1299.21) 694.76,-1299.21 694.76,1754.37 cw(c812.87,1754.37) 812.87,1872.48 1673.23,1872.48 cw(c1673.23,1754.37) 1791.34,1754.37 1791.34,-1218.07 1948.82,-1375.55 1948.82,-3228.35 cw(c1830.71,-3228.35) 1830.71,-3346.46 -1830.71,-3346.46 cw(c-1830.71,-3228.35) -1948.82,-3228.35 -1948.82,-1377.95 -1791.34,-1220.47 -1791.34,3289.57 cw(c-1673.23,3289.57) -1673.23,3407.68 -812.84,3407.68 cw(c-812.84,3289.57) -694.72,3289.57 ; -694.73,3289.57 -694.72,-1299.21
  lines w59.06: -1008.27,-2807.69 -1008.27,-2507.69 -386.01,-1885.43 ; 386.01,-1885.43 1008.27,-2507.69 1008.27,-2807.69

## Text inside footprints (layer, text, board x,y; h text height)
D1: Top Overlay "T" at -431.07,-2782.94 h31.5 r180; Top Overlay "R" at -29.46,-2782.94 h31.5 r180; Top Overlay "Vcc" at -45.9,-3050.37 h31.5 r180; Top Overlay "RL" at -168.59,-3051.06 h31.5 r180; Top Overlay "GND" at 52.5,-3047.94 h31.5 r180; Top Overlay "Vo" at 138.47,-3048.57 h31.5 r180; Top Overlay "A" at -280.11,-3048.57 h31.5 r180; Top Overlay "C" at -380.11,-3047.94 h31.5 r180
M1: Top Overlay "Vo+" at 1519.6,-2630.95 h30; Top Overlay "0V" at 1438.1,-2630.95 h30; Top Overlay "Vo-" at 1335.52,-2630.95 h30; Top Overlay "GND" at 721.53,-2630.95 h30; Top Overlay "QAxx3H-R3" at 970.28,-2739.25 h30; Top Overlay "Vin" at 635.31,-2632.38 h30
M2: Top Overlay "Vo+" at -1518.6,-2581.29 h30 r180; Top Overlay "0V" at -1437.11,-2581.29 h30 r180; Top Overlay "Vo-" at -1334.52,-2581.29 h30 r180; Top Overlay "GND" at -720.53,-2581.29 h30 r180; Top Overlay "QAxx3H-R3" at -969.28,-2472.98 h30 r180; Top Overlay "Vin" at -634.31,-2579.86 h30 r180
Q3: Top Overlay "NTC" at -1114.37,2743.67 h120 r90; Top Overlay "C" at -1114.37,1496.03 h120 r90; Top Overlay "E" at -1114.37,-472.47 h120 r90; Top Overlay "G" at -1114.37,-39.4 h120 r90; Top Overlay "C" at 1114.37,1574.83 h120 r270; Top Overlay "G" at 1114.37,39.4 h120 r270; Top Overlay "E" at 1114.37,-393.67 h120 r270